# Altium PCB HVPCB.PcbDoc
Units mm, origin at the board's own origin, x right, y up, seen from the top; angles counter-clockwise.
Board outline 175 x 100 mm, 2 copper layers (Top Layer, Bottom Layer); 83 components, 46 nets, 215 pads, 76 vias.
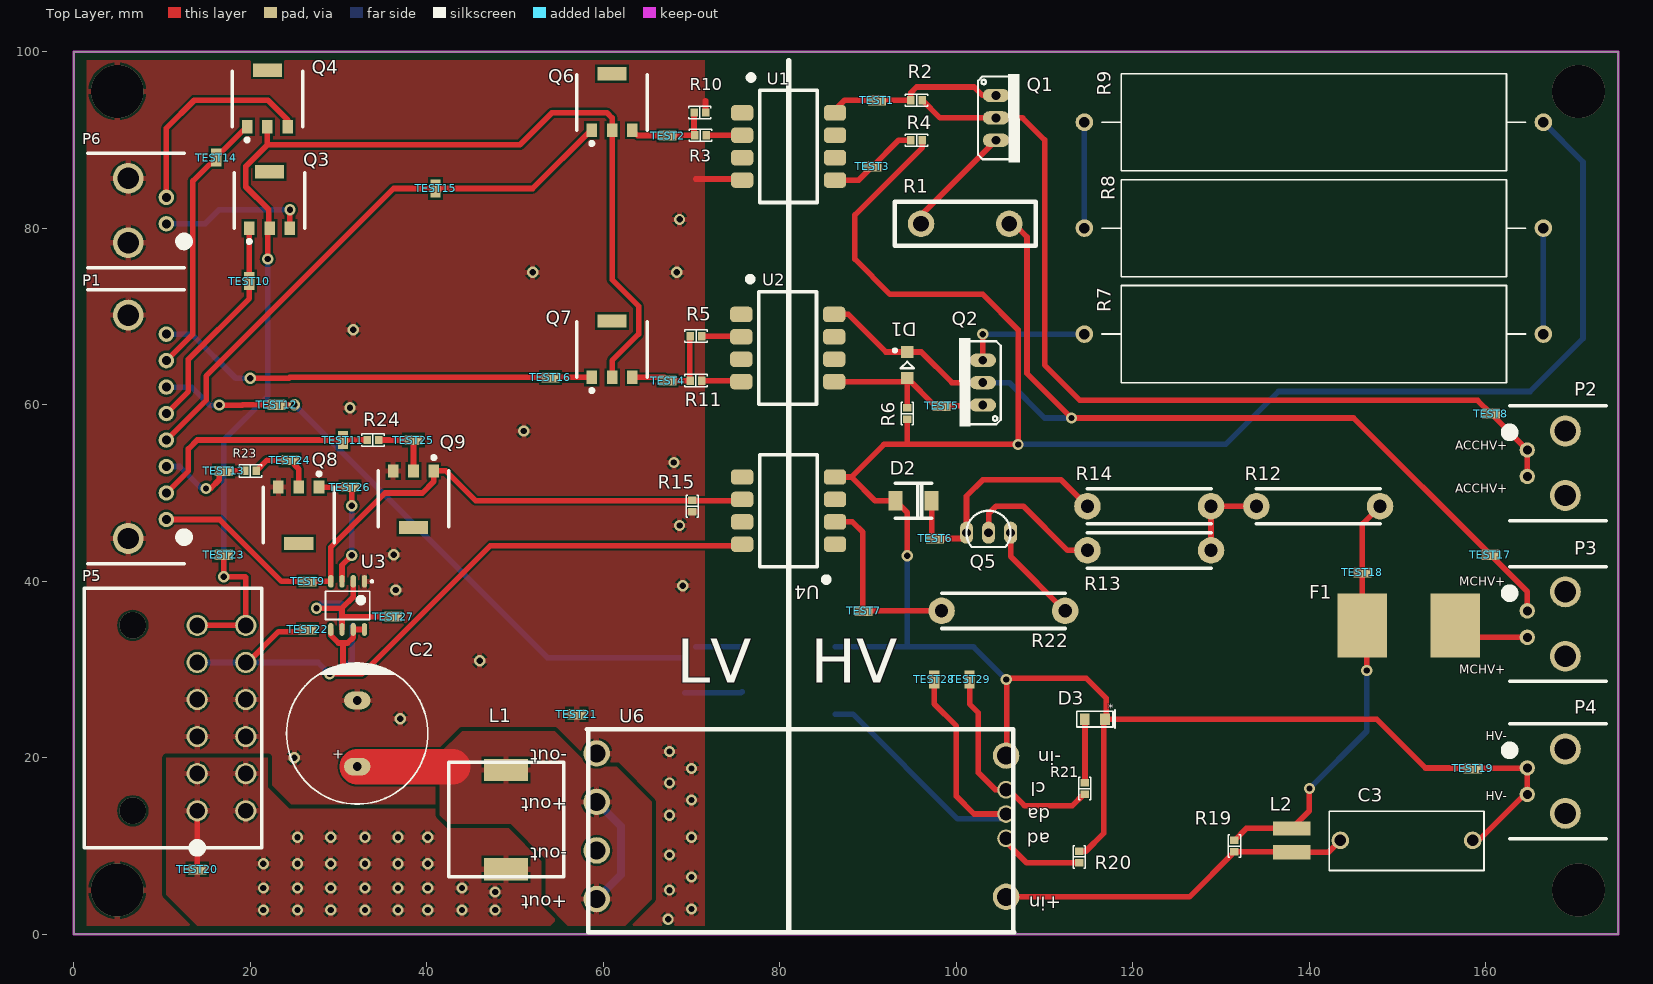
[diagram p0: Top Layer view]
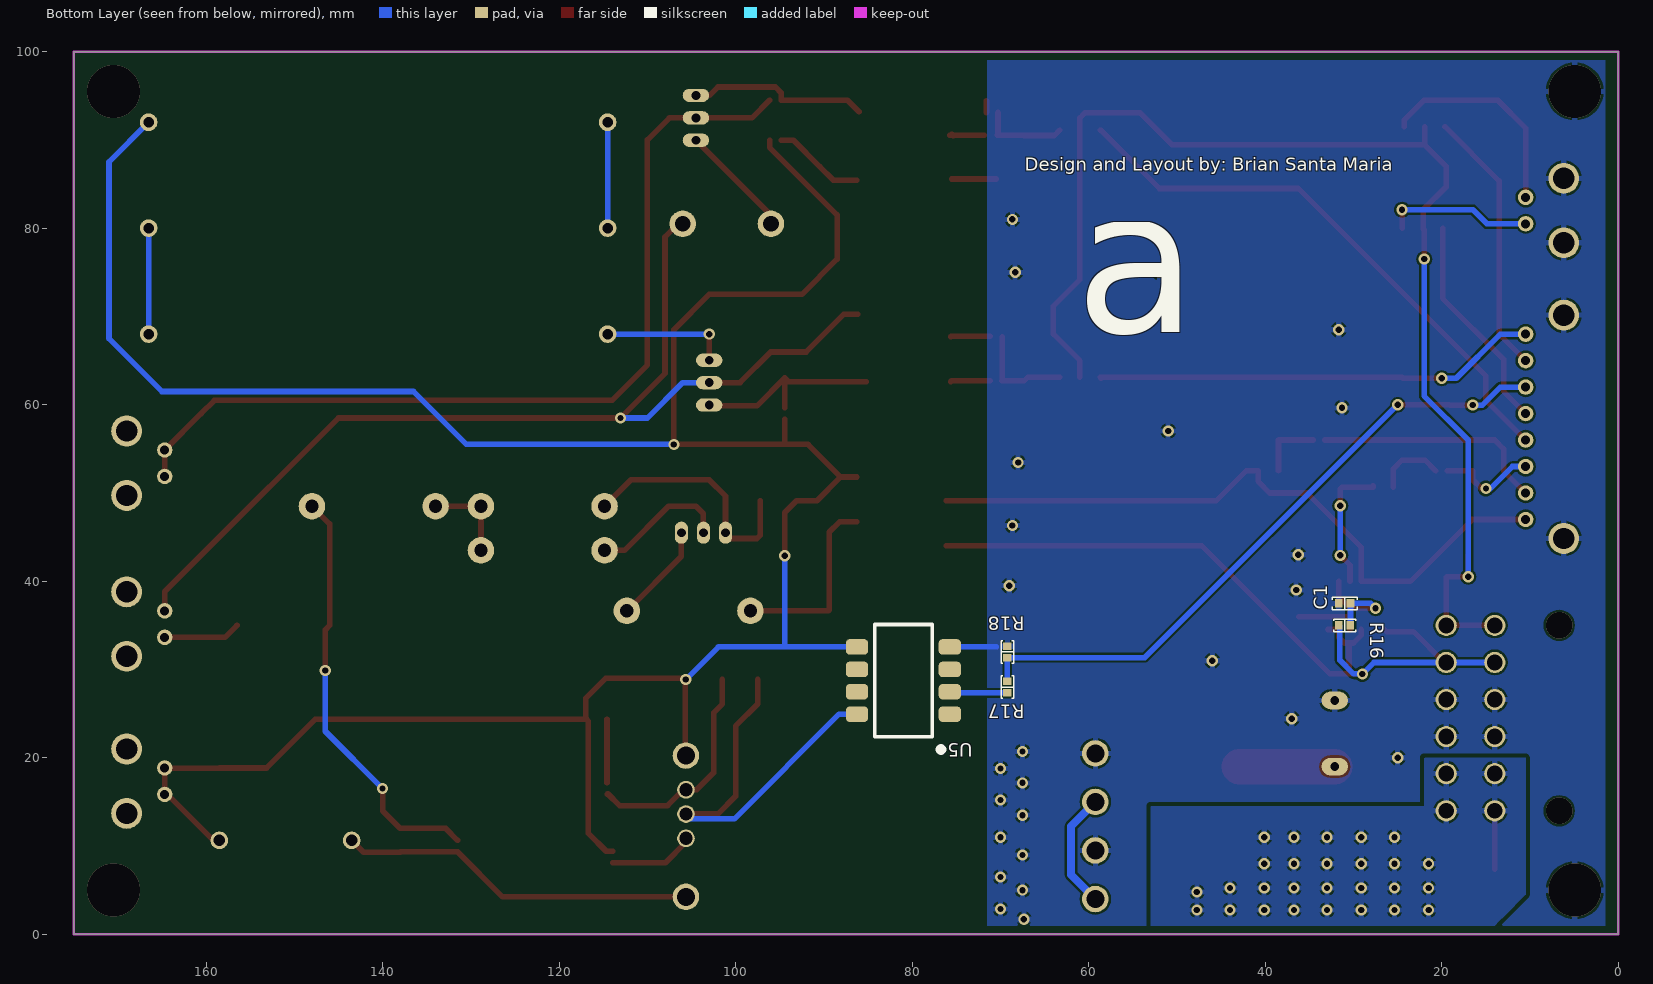
[diagram p1: Bottom Layer view, seen from below]
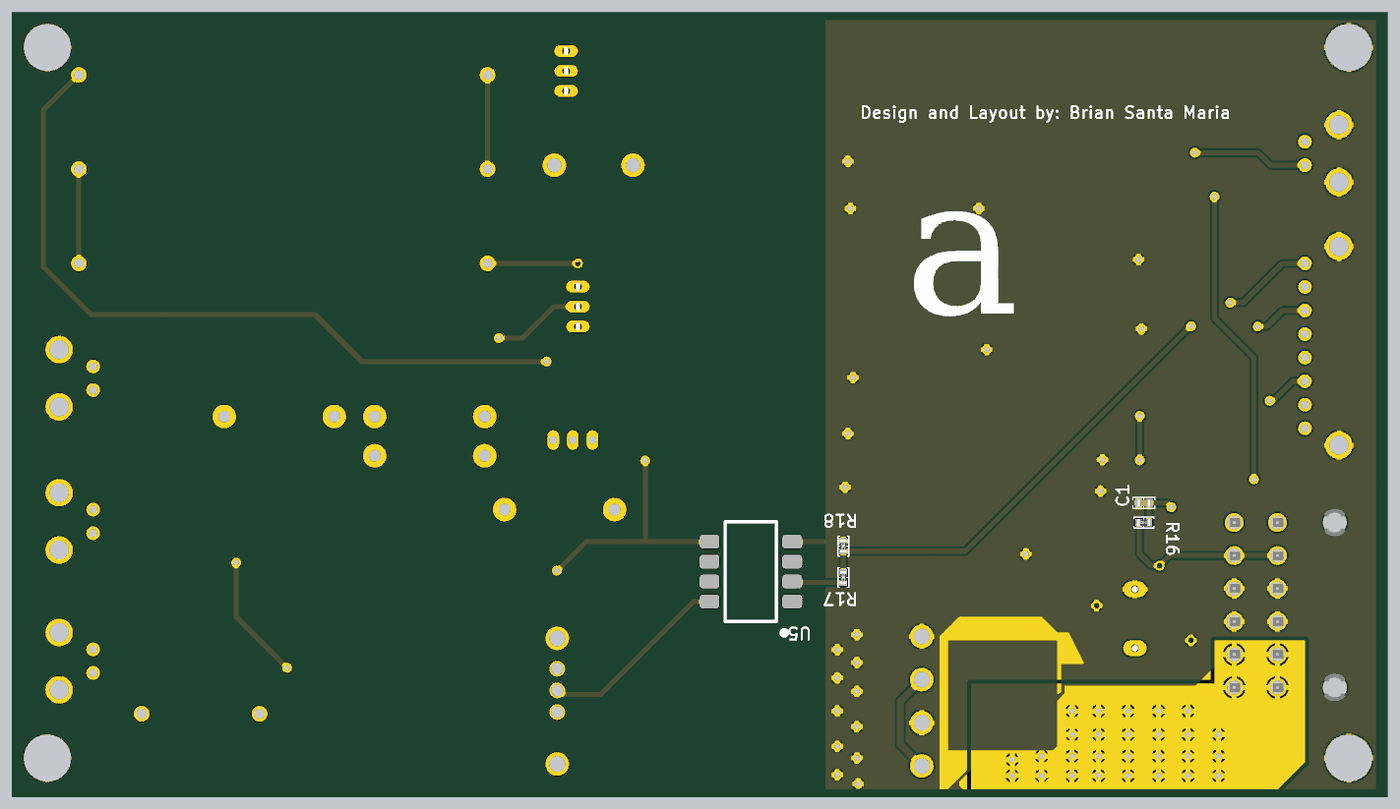
[diagram p2: 3D render of the assembled board from below, using the file's embedded part models]

## Layer stack, top to bottom
Top Solder: solder mask 0.0102, Solder Resist, Dk 3.5
Top Layer: signal copper 0.0356
Dielectric 1: dielectric 0.32, FR-4, Dk 4.8
Bottom Layer: signal copper 0.0356
Bottom Solder: solder mask 0.0102, Solder Resist, Dk 3.5

## Board outline
0,0 175,0 175,100 0,100

## Design rules (kind name [scope] priority, off if disabled: settings)
BoardOutlineClearance [All] p1: gap=0.279 ignorepadtopadclearanceinfootprint=FALSE
Clearance [All] p1: gap=0.254 ignorepadtopadclearanceinfootprint=FALSE except(0.5: Poly-Poly)
HoleSize [All] p1: absolutevalues=TRUE maxlimit=5 minlimit=0.025 maxpercent=80.000 minpercent=20.000
PolygonConnect [All] p1: connectstyle=Relief reliefconductorwidth=0.635 reliefentries=4 polygonreliefangle="90 Angle" airgapwidth=0.254
RoutingVias [All] p1: holewidth=0.711 width=1.27 viastyle="Through Hole" minholewidth=0.711 minwidth=1.27 maxholewidth=0.711 maxwidth=1.27
SolderMaskExpansion [All] p1: expansion=0.102
Width [All] p1: maxlimit=10 minlimit=0.254 preferedwidth=0.635 minimp=50.000000 maximp=50.000000 favimp=50.000000
29 further rules are at their usual default settings.

## Classes and differential pairs
component class Power: C2 C3 D3 L1 L2 R17 R18 R19 R20 R21 TEST28 TEST29 U5 U6
component class LV: C1 Q8 Q9 R16 R23 R24 TEST24 TEST25 TEST26 TEST27 U3
component class HVSchematic: F1 P1 P2 P3 P4 P5 P6 Q3 Q4 TEST8 TEST9 TEST10 TEST11 TEST12 TEST13 TEST14 TEST15 TEST16 TEST17 TEST18 TEST19 TEST20 TEST21 TEST22 TEST23
component class Isolation: D1 D2 Q1 Q2 Q5 Q6 Q7 R1 R2 R3 R4 R5 R6 R7 R8 R9 R10 R11 R12 R13 R14 R15 R22 TEST1 TEST2 TEST3 TEST4 TEST5 TEST6 TEST7 U1 U2 U4

## Components (designator, comment, footprint, x,y, rotation, side; value= is the part's Value field where it differs from the comment)
C1 "Capacitor MLCC 1.0uf 16V CAP 0603/1608" "CAP 0603/1608" 31,37.5 r180 bottom value=1.0uf
C2 "4700uf" "CAP AL TH D16 L7.5 H16.5" 32.127,22.75 r90 top
C3 "HV Cap" ECW-FD2W684K-TH-CAP 158.5,10.65 r180 top value=.68uf
D1 "DDZ9701-7" SOD123F 94.44,64.5 r90 top value=14Vz
D2 "SMBJ5370B" SMBJ5370B-TP 93.106,49.116 r90 top value=56V
D3 "LED" 0805_LED 115.704,24.384 r0 top value=Red
F1 "" 0885004.DR 156.5,35 r180 top value=4A
L1 "744309033" 744309033 49,13 r270 top value=330nH
L2 "SRR3818A-1R0Y" SRR3818A-1R0Y 138,12 r270 top value=1uH
P1 "2-1445054-8" 2-1445054-8 10.5,47 r270 top
P2 "2-1445054-2" 2-1445054-2 164.68,51.873 r90 top
P3 "2-1445054-2" 2-1445054-2 164.68,33.65 r90 top
P4 "2-1445054-2" 2-1445054-2 164.68,15.85 r90 top
P5 "0039301120" 0039301120 14,35 r270 top
P6 "2-1445054-2" 2-1445054-2 10.5,83.5 r270 top
Q1 "FQP3P50" TO-220AB 104.5,92.5 r270 top value=P_Channel
Q2 "FQP3P50" TO-220AB 103,62.5 r90 top value=P_Channel
Q3 "STN3NF06L" STN3NF06L 19.9,80 r0 top value=N_Channel
Q4 "STN3NF06L" STN3NF06L 19.65,91.5 r0 top value=N_Channel
Q5 "Comment" "TO-92 (TO-226)" 103.65,45.5 r180 top value=.5A
Q6 "STN3NF06L" STN3NF06L 58.7,91.1 r0 top value=N_Channel
Q7 "STN3NF06L" STN3NF06L 58.7,63.1 r0 top value=N_Channel
Q8 "STN3NF06L" STN3NF06L 27.8,50.669 r180 top value=N_Channel
Q9 "STN3NF06L" STN3NF06L 40.8,52.5 r180 top value=N_Channel
R1 "Resistor 1k2 100W 1% Throughhole" AP101 96,80.5 r0 top value=1.2k
R2 "Resistor 1.0M 0603 1/10W 10%" "RES 0603/1608" 95.5,94.5 r180 top value=1.0M
R3 "Resistor 3.0k 0603 1/10W 1%" "RES 0603/1608" 71,90.53 r0 top value=3.0k
R4 "Resistor 33M 0603 1/10W 10%" "RES 0603/1608" 95.5,89.96 r180 top value=33M
R5 "Resistor 3.0k 0603 1/10W 1%" "RES 0603/1608" 70.525,67.777 r0 top value=3.0k
R6 "Resistor 1.0M 0603 1/10W 1%" "RES 0603/1608" 94.44,59 r90 top value=1.0M
R7 "Resistor 1.6k Axial 10W 5%" "Axial 52mm Pitch" 166.5,68 r180 top value=1.6k
R8 "Resistor 1.6k Axial 10W 5%" "Axial 52mm Pitch" 114.5,80 r0 top value=1.6k
R9 "Resistor 1.6k Axial 10W 5%" "Axial 52mm Pitch" 166.5,92 r180 top value=1.6k
R10 "Resistor 4.7k 0603 1/10W 5%" "RES 0603/1608" 70.934,93.103 r180 top value=4.7k
R11 "Resistor 4.7k 0603 1/10W 5%" "RES 0603/1608" 70.5,62.729 r180 top value=4.7k
R12 "Resistor 2W TH" PR02 148,48.5 r180 top value=0
R13 "Resistor 2W TH" PR02 128.856,43.5 r180 top value=5.1k
R14 "Resistor 2W TH" PR02 114.856,48.5 r0 top value=10k
R15 "Resistor 4.7k 0603 1/10W 5%" "RES 0603/1608" 70.084,48.5 r90 top value=4.7k
R16 "Resistor 200k 0603 1/10W 1%" "RES 0603/1608" 31,35 r0 bottom value=200k
R17 "Resistor 3.0k 0603 1/10W 1%" "RES 0603/1608" 69.223,28 r270 bottom value=3.0k
R18 "Resistor 4.7k 0603 1/10W 1%" "RES 0603/1608" 69.223,32 r270 bottom value=4.7k
R19 "Resistor 1.0 0603 1/10W 1%" "RES 0603/1608" 131.5,10 r270 top value=1.0
R20 "Resistor 13k 0603 1/10W 1%" "RES 0603/1608" 113.919,8.763 r270 top value=13k
R21 "Resistor 330 0603 1/10W 1%" "RES 0603/1608" 114.554,16.51 r270 top value=330
R22 "Resistor 2W TH" PR02 98.33,36.65 r0 top value=15k
R23 "Resistor 1.0 0603 1/10W 1%" "RES 0603/1608" 20.035,52.5 r180 top value=0
R24 "Resistor 1.0 0603 1/10W 1%" "RES 0603/1608" 33.909,56 r180 top value=0
TEST1 "RCU-0C" RCU-0C 91,94.5 r90 top value=CONN
TEST2 "RCU-0C" RCU-0C 67.295,90.5 r90 top value=CONN
TEST3 "RCU-0C" RCU-0C 90.5,87 r90 top value=CONN
TEST4 "RCU-0C" RCU-0C 67.295,62.729 r90 top value=CONN
TEST5 "RCU-0C" RCU-0C 98.33,59.875 r90 top value=CONN
TEST6 "RCU-0C" RCU-0C 97.59,44.85 r270 top value=CONN
TEST7 "RCU-0C" RCU-0C 89.5,36.65 r90 top value=CONN
TEST8 "RCU-0C" RCU-0C 160.553,59 r90 top value=CONN
TEST9 "RCU-0C" RCU-0C 26.5,39.991 r270 top value=CONN
TEST10 "RCU-0C" RCU-0C 19.9,74 r180 top value=CONN
TEST11 "RCU-0C" RCU-0C 30.5,56 r0 top value=CONN
TEST12 "RCU-0C" RCU-0C 23,60 r270 top value=CONN
TEST13 "RCU-0C" RCU-0C 17,52.5 r270 top value=CONN
TEST14 "RCU-0C" RCU-0C 16.15,88 r0 top value=CONN
TEST15 "RCU-0C" RCU-0C 41,84.5 r0 top value=CONN
TEST16 "RCU-0C" RCU-0C 54,63.1 r270 top value=CONN
TEST17 "RCU-0C" RCU-0C 160.5,43 r90 top value=CONN
TEST18 "RCU-0C" RCU-0C 146,41 r90 top value=CONN
TEST19 "RCU-0C" RCU-0C 158.5,18.798 r90 top value=CONN
TEST20 "RCU-0C" RCU-0C 14,7.375 r90 top value=CONN
TEST21 "RCU-0C" RCU-0C 57,24.94 r90 top value=CONN
TEST22 "RCU-0C" RCU-0C 26.5,34.541 r90 top value=CONN
TEST23 "RCU-0C" RCU-0C 17,43 r90 top value=CONN
TEST24 "RCU-0C" RCU-0C 24.5,53.723 r90 top value=CONN
TEST25 "RCU-0C" RCU-0C 38.5,56 r90 top value=CONN
TEST26 "RCU-0C" RCU-0C 31.3,50.669 r90 top value=CONN
TEST27 "RCU-0C" RCU-0C 36.2,36 r90 top value=CONN
TEST28 "RCU-0C" RCU-0C 97.5,28.875 r180 top value=CONN
TEST29 "RCU-0C" RCU-0C 101.5,28.875 r180 top value=CONN
U1 "VO2223B" "Option 7" 81,89.26 r0 top
U2 "VO2223B" "Option 7" 80.899,66.426 r0 top
U3 "LM555 Timer" SOIC-8 31.038,37.266 r270 top
U4 "VO2223B" "Option 7" 81,48 r180 top
U5 "VO2223B" "Option 7" 81,28.75 r0 bottom
U6 "DCM290P138T600A40" DCM290P138T600A40 82.44,12.25 r180 top value=Null

## Footprints (in the part's own frame and the unit in brackets; to place one, negate y for a bottom-side part, rotate by r counter-clockwise, add the part's x,y. Pads: shape width x height; smd on the part's side, far side on the other; paste and mask are expansions set on the pad)
2-1445054-2 [mm] "2p through hole connector"
  round 1.75 hole 1.02: 1(3,0) 2(0,0)
  round 3.5 hole 2.41: 3(-2.15,-4.32) 4(5.15,-4.32)
  silkscreen extent -5,-8.92 8,2.5, body extent -5,-8.92 8,2, height 4.37
2-1445054-8 [mm] "8p through hole connector"
  round 1.75 hole 1.02: 1(0,0) 2(-3,0) 3(-6,0) 4(-9,0) 5(-12,0) 6(-15,0) 7(-18,0) 8(-21,0)
  round 3.5 hole 2.41: 9(-23.15,-4.32) 10(2.15,-4.32)
  silkscreen extent -26,-8.92 5,2.5, body extent -26,-8.92 5,0, height 4.37
0805_LED [mm]
  rect 1.1x1.3 smd: 1(-1.15,0) 2(1.15,0)
  silkscreen extent -2.06,-1.02 2.29,1.02, body extent -1.05,-0.67 1.05,0.68, height 0.9
0885004.DR [mm] "4A 450VDC nonreset SMD fuse"
  rect 5.6x7.23 smd: 1(0,0) 2(10.5,0)
0039301120 [mm] "12-pin Molex Minifit Jr"
  round 2.4 hole 1.8: 1(21,0) 2(16.8,0) 3(12.6,0) 4(8.4,0) 5(4.2,0) 6(0,0) 7(21,5.5) 8(16.8,5.5) 9(12.6,5.5) 10(8.4,5.5) 11(4.2,5.5) 12(0,5.5)
  silkscreen extent -4.2,-12.8 25.7,7.3, body extent -2.7,-13.9 24.1,6.04, height 11.41
744309033 [mm] "330nH ww inductor"
  rect 2.5x5 smd: 1(-5.625,0) 2(5.625,0)
  silkscreen extent -6.5,-6.5 6.5,6.5
AP101 [mm] "100W Through Hole Resistor"
  round 3 hole 1.8: 1(0,0) 2(10,0)
  silkscreen extent -3,-2.5 13,2.5, body extent -3,-2.5 13,2.5, height 24.5
"Axial 52mm Pitch" [mm]
  round 2 hole 1.2: 1(0,0) 2(52,0)
  silkscreen extent 2,-5.5 50,5.5, body extent 4.19,-5.46 47.88,5.46, height 9.1
"CAP 0603/1608" [mm] "Chip Capacitor, 2-Leads, Body 1.60x0.80mm, IPC Medium Density"
  rect 0.9x1 smd: 1(-0.675,0) 2(0.675,0)
  silkscreen extent -1.4,-0.7 1.4,0.7, body extent -0.8,-0.41 0.8,0.41, height 0.82
"CAP AL TH D16 L7.5 H16.5" [mm] "16MM Diameter, 7.5MM Lead Spacing Aluminium Capacitor"
  oval 2x3 hole 1: 1(-3.75,0) 2(3.75,0)
  silkscreen extent -8,-8 8,8, body extent -8,-7.99 8,7.99, height 16.7
DCM290P138T600A40 [mm] "Vicor DC/DC converter"
  round 3 hole 2.03: 1(-23.19,8) 5(-23.19,-8) 6(23.19,8.25) 7(23.19,2.75) 8(23.19,-2.75) 9(23.19,-8.25)
  round 2 hole 1.52: 2(-23.19,1.38) 3(-23.19,-1.38) 4(-23.19,-4.13)
  silkscreen extent -24.15,-11 24.3,12, body extent -24,-11 24,12, height 7.3
ECW-FD2W684K-TH-CAP [mm]
  round 2 hole 1.3: 1(0,0) 2(15,0)
  silkscreen extent -1.27,-3.3 16.26,3.43, body extent -1.35,-3.3 16.35,3.45, height 10
"Option 7" [mm]
  rrect50% 2.52x1.75 smd mask+0.102: 1(-5.26,3.81)
  rrect50% 2.52x1.75 smd: 2(-5.26,1.27) 3(-5.26,-1.27) 4(-5.26,-3.81) 5(5.26,-3.81) 6(5.26,-1.27) 7(5.26,1.27) 8(5.26,3.81)
  silkscreen extent -4.56,-6.35 3.26,8.11
PR02 [mm] "TH 2W resistor family"
  round 3 hole 1.5: 1(0,0) 2(14,0)
  silkscreen extent 0,-2 14,2
RCU-0C [mm]
  rect 1.15x2.05 smd: 1(0,0)
"RES 0603/1608" [mm] "Chip Resistor, 2-Leads, Body 1.60x0.80mm, IPC Medium Density"
  rect 0.85x0.95 smd: 1(-0.65,0) 2(0.65,0)
  silkscreen extent -1.27,-0.7 1.27,0.7, body extent -0.8,-0.4 0.8,0.4, height 0.45
SMBJ5370B-TP [mm] "56V zener diode"
  rect 2.2x1.6 smd: 1(0,0) 2(0,-4.1)
  silkscreen extent -2,-4.1 2,0
SOD123F [mm] "SODFL, 2-Leads, Body 1.80x3.50mm, IPC Low Density"
  rect 1.35x1.45 smd: 1(-1.475,0) 2(1.475,0)
  silkscreen extent -0.38,-0.76 1.75,1.5, body extent -1.75,-0.95 1.75,0.95, height 1.15
SOIC-8 [mm] "SOIC, 8-Leads, Body 4.90x3.90mm, Pitch 1.27mm, IPC Medium Density"
  oval 1.45x0.6 smd: 1(-2.725,1.905) 2(-2.725,0.635) 3(-2.725,-0.635) 4(-2.725,-1.905) 5(2.725,-1.905) 6(2.725,-0.635) 7(2.725,0.635) 8(2.725,1.905)
  silkscreen extent -2.85,-2.5 1.6,2.88, body extent -3,-2.5 3,2.5, height 1.75
SRR3818A-1R0Y [mm] "1uH fixed inductor"
  rect 1.6x4.3 smd: 1(0,0) 2(2.7,0)
STN3NF06L [mm] "N-channel Power MOSFET"
  rect 1.2x1.5 smd: 1(0,0) 2(2.3,0) 3(4.6,0)
  rect 3.3x1.5 smd: 4(2.3,6.4)
  silkscreen extent -1.7,-1.7 6.3,6.3
"TO-92 (TO-226)" [mm] "TO-92, TO-226, ransistor, MPSA56"
  oval 1.5x2.5 hole 1: 1(2.5,0) 2(0,0) 3(-2.5,0)
  silkscreen extent -2.5,-2.5 2.5,1.61, body extent -2.79,-2.48 2.79,0.96, height 7.37
TO-220AB [mm] "TO-220AB, MOSFET, DIODE, BJT"
  oval 1.5x3 hole 1: 1(-2.54,0) 2(0,0) 3(2.54,0)
  silkscreen extent -4.95,-2.03 5.05,2.71, body extent -5.94,-1.75 5.94,2.65, height 19.11

## Part data
C1: library part 229, Dielectric=Ceramic, Manufacturer_id=1, Package="CAP 0603/1608", Voltage_Rating=16V, Created_By="Nick Mah", Created_Date=10/20/2018, Drawer_id=1, idCapacitor=229, Name="Cap_1.0uf_16V_CAP 0603/1608"
C2: library part 1083, Manufacturer_id=1, MfrPartNo=UVZ1E472MHD, Package=TH, Tolerance=20%, Voltage_Rating=25V, ComponentLink1Description=Datasheet, Created_By="Angel Delgado", Drawer_id=1, idCapacitor=1083, Link=https://www.digikey.com/product-detail/en/nichicon/UVZ1E472MHD/493-1308-ND/589049, Name="Cap_4700uf_25V_CAP TH"
C3: library part 1082, Dielectric=Polypropylene, Manufacturer_id=1, MfrPartNo=ECW-FD2W684K, Package=TH, Tolerance=10%, Voltage_Rating=450V, ComponentLink1Description=Datasheet, Created_By="Angel Delgado", Drawer_id=1, idCapacitor=1082, Link=https://www.mouser.com/ProductDetail/Panasonic/ECW-FD2W684K?qs=sGAEpiMZZMsh%252b1woXyUXj8Oz95SkSMnKDNbVTfkAU30%3d, Name="Cap_.68uf_450V_CAP TH"
D1: library part 10, "Zener Diode 14V 500mW ±5% Surface Mount SOD-123", Manufacturer_id=8, Package=SOD-123, Power=500mW, Supplier1PartNo=DDZ9701-7DICT-ND, ComponentLink1Description=Datasheet, ComponentLink1URL=https://www.diodes.com/assets/Datasheets/ds30410.pdf, Drawer_id=1, idDiode=10, Link=https://www.digikey.com/product-detail/en/diodes-incorporated/DDZ9701-7/DDZ9701-7DICT-ND/3877402, MfrPartNo=DDZ9701-7, Name=DDZ9701, Num_Circuits=1, Supplier1=Digi-Key, Type=Zener
D2: library part 13, "56V Zener Diode", Manufacturer_id=1, Supplier1PartNo=SMBJ5370B-TPMSCT-ND, ComponentLink1Description=Digikey, ComponentLink1URL=https://www.digikey.com/product-detail/en/micro-commercial-co/SMBJ5370B-TP/SMBJ5370B-TPMSCT-ND/3165257, Created_By=Graydon, Drawer_id=1, idDiode=13, Link=https://www.digikey.com/product-detail/en/micro-commercial-co/SMBJ5370B-TP/SMBJ5370B-TPMSCT-ND/3165257, Name=SMBJ5370B-TP, Num_Circuits=1, Supplier1=Digikey, Type=Zener
D3: library part 1, Package=0805, Drawer_id=1, idLED=1, Manufacturer_id=1, Name=LED_0805_RED, Vf=0.7V
F1: library part 7, Manufacturer_id=1, MfrPartNo=0885004.DR, Created_By=Graydon, Created_Date=11/12/2018, Drawer_id=1, I_hold=4A, idFuse=7, Link=https://www.digikey.com/product-detail/en/littelfuse-inc/0885004.DR/F10991CT-ND/8345705, Name=0885004.DR, Pd_Typ=316mW, V_max=450VDC
L1: library part 3, "330nH wirewound inductor", Manufacturer_id=1, Package=Nonstandard, Supplier1PartNo=732-3006-1-ND, Created_By=Graydon, Created_Date=11/12/2018, Drawer_id=1, idInductor=3, Link=https://www.digikey.com/product-detail/en/wurth-electronics-inc/744309033/732-3006-1-ND/2626130, MfrPartNo=744309033, Name=744309033, Supplier1=Digikey
L2: library part 4, "1uH fixed inductor", Manufacturer_id=1, Package=Nonstandard, Supplier1PartNo=652-SRR3818A-1R0Y, ComponentLink1Description=Mouser, ComponentLink1URL=https://www.mouser.com/ProductDetail/Bourns/SRR3818A-1R0Y?qs=EU6FO9ffTwdCQ1wGwZI3iw%3D%3D, Created_By=Graydon, Created_Date=11/12/2018, Drawer_id=1, idInductor=4, Link=https://www.mouser.com/ProductDetail/Bourns/SRR3818A-1R0Y?qs=EU6FO9ffTwdCQ1wGwZI3iw%3D%3D, MfrPartNo=SRR3818A-1R0Y, Name=SRR3818A-1R0Y, Supplier1=Mouser
P1: library part 12, "1x8 connector", Manufacturer_id=5, Supplier1PartNo=2-1445054-8-ND, ComponentLink1Description=Datasheet, Created_By=Graydon, Created_Date=11/10/2018, Drawer_id=1, idConn=12, Link=https://www.digikey.com/product-detail/en/te-connectivity-amp-connectors/2-1445054-8/2-1445054-8-ND/1890093, MfrPartNo=2-1445054-8, Name="Micro MATE-N-LOK 1x8", Num_Contacts=8, Num_Rows=1, Supplier1=Digi-Key
P2 P3 P4 P6: library part 16, "1x2 connector", Manufacturer_id=5, Supplier1PartNo=2-1445054-2-ND, Voltage_Rating=Null, ComponentLink1Description=Digikey, ComponentLink1URL=Null, Created_By=Graydon, Created_Date=11/12/2018, Drawer_id=1, idConn=16, Link=https://www.digikey.com/products/en?keywords=2-1445054-2, MfrPartNo=2-1445054-2, Name="Micro MATE-N-LOK 1x2", Num_Contacts=2, Num_Rows=1, Pitch=Null, Supplier1=Digi-Key, Updated_By=Null
P5: library part 20, "Molex Minifit Jr 12p right angle", idConn=20
Q1 Q2: library part 5, Manufacturer_id=1, Package=TO-220, Power(Max)=85W, Supplier1PartNo=FQP3P50-ND, Created_By=Angel, Drawer_id=1, Id=2.7A, idFETs=5, Link=https://www.digikey.com/product-detail/en/on-semiconductor/FQP3P50/FQP3P50-ND/1055021, MfrPartNo=FQP3P50, Name=FQP3P50, Num_Circuits=1, Rds_On=4Ohms, Supplier1=Digi-Key, Vdss=500V, Vgs(Max)=5.0V, Vgs(typ)=4.0v
Q3 Q4 Q6 Q7 Q8 Q9: library part 8, "MOSFET N-CH 60V 4A SOT223", Manufacturer_id=1, Package=SOT-233, Power(Max)=3.3W, Supplier1PartNo=497-3177-1-ND, ComponentLink1Description=Datasheet, ComponentLink1URL=https://www.st.com/content/ccc/resource/technical/document/datasheet/b1/52/93/f0/a9/a9/40/d7/CD00002430.pdf/files/CD00002430.pdf/jcr:content/translations/en.CD00002430.pdf, Created_By=Graydon, Created_Date=11/26/2018, Drawer_id=1, Id=4A, idFETs=8, Link=https://www.digikey.com/product-detail/en/stmicroelectronics/STN3NF06L/497-3177-1-ND/654516, MfrPartNo=STN3NF06L, Name=STN3NF06L, Num_Circuits=1, Rds_On=70m, Supplier1=Digkey, Vdss=60V, Vgs(Max)="+/- 16V"
Q5: library part 1, Created_By="Angel Delgado", Created_Date=6/10/2018, Drawer_id=1, hFE=100, idBJT=1, Manufacturer_id=1, Name=MPSA56, Type=PNP
R1: library part 2705, "100W Throughhole Resistor", Manufacturer_id=1, MfrPartNo="AP101 1K2 J", Package=TO-247-2, Power=100W, Supplier Part Number 1=AP1011K2J-ND, Tolerance=5%, ComponentLink1Description=Datasheet, ComponentLink1URL=https://www.ohmite.com/assets/docs/acl_ap101.pdf?r=false, Created_By=Graydon, Created_Date=2018-11-24, Drawer_id=1, idResistor=2705, Link=https://www.digikey.com/short/jvdcjz, Name="AP101 1K2 J", Supplier 1=Digi-Key
R2: library part 2341, Manufacturer_id=1, Package=0603, Power=1/10W, Tolerance=10%, ComponentLink1Description=Datasheet, Created_By="Nick Mah", Created_Date=2018-10-20, Drawer_id=1, idResistor=2341, Name=Res_1.0M_0603_1/10W_10%, Supplier 1=Digi-Key
R3 R5 R17: library part 300, Manufacturer_id=1, Package=0603, Power=1/10W, Tolerance=1%, ComponentLink1Description=Datasheet, Created_By="Nick Mah", Created_Date=2018-10-20, Drawer_id=1, idResistor=300, Name=Res_3.0k_0603_1/10W_1%, Supplier 1=Digi-Key
R4: library part 2359, Manufacturer_id=1, Package=0603, Power=1/10W, Tolerance=10%, ComponentLink1Description=Datasheet, Created_By="Nick Mah", Created_Date=2018-10-20, Drawer_id=1, idResistor=2359, Name=Res_33M_0603_1/10W_10%, Supplier 1=Digi-Key
R6: library part 361, Manufacturer_id=1, Package=0603, Power=1/10W, Tolerance=1%, ComponentLink1Description=Datasheet, Created_By="Nick Mah", Created_Date=2018-10-20, Drawer_id=1, idResistor=361, Name=Res_1.0M_0603_1/10W_1%, Supplier 1=Digi-Key
R7 R8 R9: library part 2706, Manufacturer_id=1, MfrPartNo=SQP10AJB-1K6, Package=Axial, Power=10W, Supplier Part Number 1=Digi-Key, Tolerance=5%, ComponentLink1Description=Datasheet, Drawer_id=1, idResistor=2706, Link=https://www.digikey.com/product-detail/en/yageo/SQP10AJB-1K6/1.6KW-10-ND/18787, Name=Res_1.6k_Axial_10W_5%, Supplier 1=Digi-Key
R10 R11 R15: library part 1385, Manufacturer_id=1, Package=0603, Power=1/10W, Tolerance=5%, ComponentLink1Description=Datasheet, Created_By="Nick Mah", Created_Date=2018-10-20, Drawer_id=1, idResistor=1385, Name=Res_4.7k_0603_1/10W_5%, Supplier 1=Digi-Key
R12 R13 R14 R22: library part 2707, "2W TH resistor", Manufacturer_id=1, Package=Axial, Power=2W, Supplier Part Number 1=Digi-Key, Tolerance=5%, ComponentLink1Description=Datasheet, Created_By=Graydon, Created_Date=2018-12-01, Drawer_id=1, idResistor=2707, Link=https://www.digikey.com/products/en/resistors/through-hole-resistors/53?FV=ffec4976, Name=PR02
R16: library part 344, Manufacturer_id=1, Package=0603, Power=1/10W, Tolerance=1%, ComponentLink1Description=Datasheet, Created_By="Nick Mah", Created_Date=2018-10-20, Drawer_id=1, idResistor=344, Name=Res_200k_0603_1/10W_1%, Supplier 1=Digi-Key
R18: library part 305, Manufacturer_id=1, Package=0603, Power=1/10W, Tolerance=1%, ComponentLink1Description=Datasheet, Created_By="Nick Mah", Created_Date=2018-10-20, Drawer_id=1, idResistor=305, Name=Res_4.7k_0603_1/10W_1%, Supplier 1=Digi-Key
R19 R23 R24: library part 217, Manufacturer_id=1, Package=0603, Power=1/10W, Tolerance=1%, ComponentLink1Description=Datasheet, Created_By="Nick Mah", Created_Date=2018-10-20, Drawer_id=1, idResistor=217, Name=Res_1.0_0603_1/10W_1%, Supplier 1=Digi-Key
R20: library part 316, Manufacturer_id=1, Package=0603, Power=1/10W, Tolerance=1%, ComponentLink1Description=Datasheet, Created_By="Nick Mah", Created_Date=2018-10-20, Drawer_id=1, idResistor=316, Name=Res_13k_0603_1/10W_1%, Supplier 1=Digi-Key
R21: library part 277, Manufacturer_id=1, Package=0603, Power=1/10W, Tolerance=1%, ComponentLink1Description=Datasheet, Created_By="Nick Mah", Created_Date=2018-10-20, Drawer_id=1, idResistor=277, Name=Res_330_0603_1/10W_1%, Supplier 1=Digi-Key
TEST1 TEST2 TEST3 TEST4 TEST5 TEST6 TEST7 TEST8 TEST9 TEST10 TEST11 TEST12 TEST13 TEST14 TEST15 TEST16 TEST17 TEST18 TEST19 TEST20 TEST21 TEST22 TEST23 TEST24 TEST25 TEST26 TEST27 TEST28 TEST29: library part 14, "Test point", Manufacturer_id=1, Supplier1PartNo=None, ComponentLink1Description=Null, ComponentLink1URL=Null, Created_By=Graydon, Created_Date=11/10/2018, Drawer_id=1, idConn=14, Link=https://www.digikey.com/product-detail/en/te-connectivity-amp-connectors/RCU-0C/A106145CT-ND/3477802, MfrPartNo=RCU-0C, Name=RCU-0C, Num_Contacts=1, Num_Rows=1, Package=RCU-0C, Supplier1=None, Updated_By=Null
U1 U2 U4 U5: library part 19, "Optocoupler, Power Phototriac", Manufacturer_id=1, Drawer_id=1, idIC_Misc=19, Name="VO2223B Optocoupler"
U3: library part 17, Manufacturer_id=1, Drawer_id=1, idIC_Misc=17, Name="LM555 Timer"
U6: library part 24, "Vicor DC/DC converter", Manufacturer_id=1, Supplier1PartNo=1102-5388-ND, Created_By=Graydon, Data_Rate=Null, Drawer_id=1, idIC_Misc=24, Link=http://www.vicorpower.com/documents/datasheets/ds_DCM290y138x600A40.pdf, MfrPartNo=DCM290P138T600A40, Name=DCM290P138T600A40, Num_Circuits=1, Protocol=Null, Supplier1=Digikey, Type=Null, Vin(Max)=Null, Vin(Min)=Null

## Via types
v1: diameter 1.27, hole 0.711, Top Layer to Bottom Layer, 70 vias
v2: diameter 6, hole 6, Top Layer to Bottom Layer, 4 vias
v3: diameter 3, hole 3, Top Layer to Bottom Layer, 2 vias

## Nets (pads, with @x,y where several pads share a name; then routed paths per layer and width w, separated by ;. In a path a pad name is that pad's centre, name@x,y a point inside that pad or via, vN(x,y) a via of type N, cw(c..) or ccw(c..) an arc to the next point about the centre after c; other vN are vias at no path point)
+12V: P5.5 P5.11 R16.2 TEST22.1 U3.5 U3.7 U3.8 U4.8 | length 93.9
  Top Layer w0.635: P5.11 19.719,30.8 23.219,34.3 26.259,34.3 TEST22.1 ; v1(29,29.5) 30.5,29.5 ; U3.5 29.133,33.867 30,33 30.512,33 ; U3.8 U3.7 31.673,33.65 31.023,33 30.512,33 ; U4.8@76.139,44.036 47.205,44.036 32.669,29.5 30.5,29.5 ; 30.5,29.5 30.512,29.512 30.512,33
  Bottom Layer w0.635: P5.5 P5.11 27.7,30.8 v1(29,29.5) 30,29.5 31.561,31.061 31.561,34.911 R16.2
+12V_Out: L1.2 P5.1 P5.2 P5.7 P5.8 TEST20.1 | length 6.6
  Top Layer w0.635: TEST20.1 P5.1
  other v1: 21.495,2.754 25.368,2.754 29.127,2.754 33,2.754 36.75,2.754 40.127,2.754 44,2.754 47.75,2.754 47.75,4.798 21.495,5.246 25.368,5.246 29.127,5.246 33,5.246 36.75,5.246 40.127,5.246 44,5.246 21.495,8 25.368,8 29.118,8 33.002,8 36.75,8 40.118,8 25.368,11 29.118,11 33.002,11 36.75,11 40.118,11
ACCHV+: P2.1 P2.2 Q1.2 R2.1 TEST8.1 | length 102.9
  Top Layer w0.635: R2.1 98.15,92.5 Q1.2 107.5,92.5 110,90 110,64.5 114,60.5 159.053,60.5 TEST8.1 P2.1 P2.2
AIR+: P1.5 Q3.1 TEST10.1 | length 24.9
  Top Layer w0.635: P1.5 13,61.5 13,63.5 13,65.15 19.9,72.05 Q3.1
AIR-: P1.7 Q4.1 TEST14.1 | length 30.3
  Top Layer w0.635: P1.7 13.5,68 13.5,69 13.5,85.35 Q4.1
DCDCEnIso: TEST28.1 U5.8 U6.3 | length 45
  Top Layer w0.635: TEST28.1 97.5,26.09 100,23.59 100,15.65 102.02,13.63 U6.3
  Bottom Layer w0.635: U5.8 88.289,24.94 100.148,13.081 U6.3@105.664,13.081
GND: C1.1 C2.2 P1.9 P1.10 P5.3 P5.4 P5.9 P5.10 P6.3 P6.4 Q8.3 Q9.3 R10.1 R11.1 R15.1 R18.1 TEST21.1 U1.4 U2.4 U3.1 U5.4 U6.7 U6.9 | length 16.1
  Top Layer w0.635: 70.5,85.572 U1.4@75.512,85.572 ; R11.1 75.526,62.729 U2.4 ; R10.1 71.584,94.416
  Bottom Layer w0.635: 70.5,32.56 U5.4
  other v1: 67.35,1.709 70,2.87 67.5,5.009 70,6.5 67.5,9 70,11 67.5,13.5 70,15.218 67.5,17.16 70,18.798 25,20 67.5,20.718 37,24.42 46,31 36.5,39.001 69,39.5 36.259,43 68.65,46.33 68,53.453 51,57.023 31.3,59.65 31.673,68.5 52,75 68.333,75 68.65,81
  other v2: 4.938,5 4.938,95.5
HV-: C3.1 D2.1 D3.2 P4.1 P4.2 R4.1 R6.1 R9.1 R20.1 TEST19.1 U4.4 U5.5 U6.5 | length 316.8
  Top Layer w0.635: U4.4 88.111,51.81 ; v1(94.44,42.893) 94.44,47.782 D2.1 90.805,49.116 88.111,51.81 ; R6.1 94.44,55.56 94.5,55.5 ; R4.1 96.15,89.15 88.5,81.5 88.5,76.5 92.5,72.5 103,72.5 107,68.5 v1(107,55.5) 94.5,55.5 ; v1@105.664,29 114.727,29 117,26.728 117,24.53 D3.2 147.616,24.384 153.15,18.85 158.448,18.85 TEST19.1 164.628,18.798 P4.1 P4.2 164.35,15.85 159.15,10.65 C3.1 ; U6.5@105.727,19.875 105.727,28.228 ; R20.1 114.666,9.413 116.683,11.43 ; 116.698,11.43 D3.2@116.698,24.13 ; 88.111,51.81 91.801,55.5 94.5,55.5
  Bottom Layer w0.635: U5.5 94.5,32.56 ; v1(94.44,42.893) 94.44,32.62 94.5,32.56 ; v1@105.414,29.086 101.94,32.56 94.5,32.56 ; v1(107,55.5) 130.5,55.5 136.5,61.5 165,61.5 171,67.5 171,87.5 R9.1 ; P4.2@164.68,15.617 P4.2
  other v1: 105.664,28.875
MCHV+: D1.2 P3.1 Q2.2 R1.2 TEST17.1 U2.8 | length 118.9
  Top Layer w0.635: U2.8 87.764,70.236 92.025,65.975 D1.2 96.025,65.975 99.5,62.5 Q2.2 ; R1.2 106.5,80.5 108,79 108,63.544 v1(113.044,58.5) 145,58.5 TEST17.1 164.68,38.82 P3.1
  Bottom Layer w0.635: Q2.2 106,62.5 110,58.5 v1(113.044,58.5)
MCHV+_Fsd: F1.2 L2.1 R12.1 R19.1 TEST18.1 | length 48
  Top Layer w0.635: R19.1 132.85,12 L2.1 140,14 v1@140,16.38 ; v1(146.5,29.893) 146.5,34.5 F1.2 TEST18.1 146,46.5 R12.1
  Bottom Layer w0.635: v1(140,16.51) 146.5,23.01 v1(146.5,29.893)
NetC1_2: C1.2 R16.1 TEST27.1 U3.2 U3.6 | length 20.2
  Top Layer w0.635: v1(27.5,36.954) 30.403,36.954 ; U3.6 30.403,36 ; U3.2 31.673,38.224 30.403,36.954 ; TEST27.1 30.403,36 ; 30.403,36 30.403,36.954
  Bottom Layer w0.635: v1(27.5,36.954) 28.046,37.5 C1.2 30.35,37.475 R16.1
NetC2_1: C2.1 L1.1 U6.6 U6.8 | length 24.1
  Top Layer w4: C2.1 42.935,19
  Bottom Layer w0.889: U6.6 62,6.75 62,12.25 U6.8
NetC3_2: C3.2 L2.2 R19.2 U6.1 | length 40.6
  Top Layer w0.635: U6.1 126.4,4.25 R19.2 137.95,9.35 L2.2 142.15,9.3 C3.2
NetD1_1: D1.1 Q2.1 R6.2 TEST5.1 U2.5 | length 22.7
  Top Layer w0.635: U2.5@85.203,62.616 U2.5 94.031,62.616 D1.1 ; R6.2 D1.1 ; Q2.1 102.915,59.875 TEST5.1 97.59,59.875 D1.1
NetD2_2: D2.2 Q5.1 R14.1 TEST6.1 | length 28.1
  Top Layer w0.635: D2.2 97.206,45.234 TEST6.1 100.5,44.85 Q5.1 101.15,49.65 103,51.5 111.856,51.5 R14.1
NetD3_1: D3.1 R21.1 | length 7.2
  Top Layer w0.635: R21.1@114.574,17.16 D3.1@114.574,24.384
NetF1_1: F1.1 P3.2 | length 8.7
  Top Layer w0.635: F1.1 157.85,33.65 P3.2
NetP1_1: P1.1 Q9.1 R15.2 TEST9.1 U3.4 U4.6 | length 78.1
  Top Layer w0.635: P1.1 14,47 16.535,47 23.544,39.991 U3.4 29.133,43.863 35.27,50 39.5,50 40.8,51.3 Q9.1 42.169,52.5 45.539,49.131 76.124,49.131 U4.6@76.139,49.116
NetP1_2: P1.2 R24.2 TEST11.1 | length 26.7
  Top Layer w0.635: P1.2 13,52.5 13,54 13,55 14,56 R24.2
NetP1_3: P1.3 R23.2 TEST13.1 | length 11.3
  Top Layer w0.635: v1(15,50.5) 15.5,50.5 16.5,51.5 16.5,52.5 R23.2
  Bottom Layer w0.635: P1.3 12,53 14.5,50.5 v1(15,50.5)
NetP1_4: P1.4 Q6.1 TEST15.1 | length 64.4
  Top Layer w0.635: P1.4 13.5,59 15,60.5 15,63.253 36.247,84.5 52,84.5 58.6,91.1 Q6.1
NetP1_6: P1.6 R17.1 R18.2 TEST12.1 | length 74.2
  Top Layer w0.635: v1(16.5,59.96) 19.085,59.96 19.125,60 v1(25,60)
  Bottom Layer w0.635: P1.6 13.359,62 15.399,59.96 v1(16.5,59.96) ; v1(25,60) 53.65,31.35 R18.2 R17.1
NetP1_8: P1.8 Q7.1 TEST16.1 | length 50.5
  Top Layer w0.635: v1(20,63) 24.4,63 24.5,63.1 Q7.1 Q7.1@58.6,63
  Bottom Layer w0.635: P1.8 13.359,68 18.359,63 v1(20,63)
NetP5_6: P5.6 P5.12 Q3.2 Q4.2 Q6.2 Q7.2 TEST23.1 | length 143.8
  Top Layer w0.635: P5.6 P5.12 19.5,40.44 19.44,40.5 v1(17,40.5) TEST23.1 ; Q4.2 21.95,89.45 ; v1(22,76.5) 22,79.8 22.1,79.9 22.1,82.1 19.5,84.7 19.5,87 21.95,89.45 ; Q7.2 61,65 64,68 64,71.171 61,74.171 Q6.2 61,92.5 60.427,93.073 54.178,93.073 50.555,89.45 21.95,89.45
  Bottom Layer w0.635: v1(17,40.5) 17,56 22,61 v1(22,76.5)
NetP6_1: P6.1 Q3.3 | length 16.8
  Top Layer w0.635: Q3.3 v1(24.5,82.1)
  Bottom Layer w0.635: P6.1 14.9,80.5 16.5,82.1 v1(24.5,82.1)
NetP6_2: P6.2 Q4.3 | length 24.6
  Top Layer w0.635: P6.2 10.5,91.339 13.661,94.5 22,94.5 24.25,92.25 Q4.3
NetQ1_1: Q1.1 R2.2 TEST1.1 U1.8 | length 20.5
  Top Layer w0.635: U1.8@86.032,93.192 87.34,94.5 TEST1.1 R2.2 94.85,95.35 95.5,96 102,96 102.96,95.04 Q1.1
NetQ1_3: Q1.3 R1.1 | length 13.4
  Top Layer w0.635: R1.1@95.04,80.5 Q1.3
NetQ2_3: Q2.3 R7.2 | length 13.5
  Top Layer w0.635: Q2.3 v1(103,68)
  Bottom Layer w0.635: v1(103,68) 113.5,68
NetQ5_2: Q5.2 R13.2 | length 15.8
  Top Layer w0.635: Q5.2 103.65,47.65 104.5,48.5 107.6,48.5 112.6,43.5 R13.2
NetQ5_3: Q5.3 R22.2 | length 11.9
  Top Layer w0.635: Q5.3@106.15,46 Q5.3 106.15,42.83 R22.2
NetQ6_3: Q6.3 R3.1 R10.2 TEST2.1 | length 9.9
  Top Layer w0.635: Q6.3 63.9,90.5 TEST2.1 67.325,90.53 R3.1 70.284,90.596 R10.2
NetQ7_3: Q7.3 R5.1 R11.2 TEST4.1 | length 11.7
  Top Layer w0.635: Q7.3 66.924,63.1 TEST4.1 R11.2 69.795,62.784 R5.1@69.795,67.696
NetQ8_1: Q8.1 TEST26.1 U3.3 | length 14.8
  Top Layer w0.635: Q8.1@27.8,50.8 Q8.1 TEST26.1 31.503,50.467 v1(31.503,48.565) ; U3.3 30.403,41.835 v1(31.503,42.935)
  Bottom Layer w0.635: v1(31.503,42.935) v1(31.503,48.565)
NetQ8_2: Q8.2 R23.1 TEST24.1 | length 7.8
  Top Layer w0.635: R23.1 21.908,53.723 TEST24.1 25.5,52.723 Q8.2
NetQ9_2: Q9.2 R24.1 TEST25.1 | length 7.4
  Top Layer w0.635: R24.1 TEST25.1 Q9.2
NetR3_2: R3.2 U1.2 | length 4.1
  Top Layer w0.635: R3.2@71.83,90.53 U1.2@75.39,90.53 ; U1.2@75.36,90.5 U1.2@75.39,90.53 ; U1.2@75.512,90.652 U1.2@75.39,90.53 ; U1.2 U1.2@75.39,90.53
NetR4_2: R4.2 TEST3.1 U1.5 | length 10.5
  Top Layer w0.635: U1.5 88.95,85.45 TEST3.1 93.46,89.96 R4.2
NetR5_2: R5.2 U2.2 | length 4.5
  Top Layer w0.635: R5.2 75.558,67.777 U2.2
NetR7_1: R7.1 R8.2 | length 12
  Bottom Layer w0.635: R7.1 R8.2
NetR8_1: R8.1 R9.2 | length 12
  Bottom Layer w0.635: R8.1 R9.2
NetR12_2: R12.2 R13.1 R14.2 | length 10.1
  Top Layer w0.635: R13.1 R14.2 R12.2
NetR17_2: R17.2 U5.2 | length 6.6
  Bottom Layer w0.635: R17.2 75.61,27.35 U5.2
NetR20_2: R20.2 U6.2 | length 9.2
  Top Layer w0.635: U6.2@105.664,10.414 107.965,8.113 R20.2
NetR21_2: R21.2 TEST29.1 U6.4 | length 24.3
  Top Layer w0.635: TEST29.1 101.5,26.09 102.5,25.09 102.5,18.31 104.43,16.38 U6.4 ; U6.4@106.301,16.004 107.717,14.588 113.155,14.588 114.49,15.924 R21.2
NetR22_1: R22.1 TEST7.1 U4.2 | length 21.4
  Top Layer w0.635: U4.2 88.23,46.73 89.4,45.56 89.4,36.75 TEST7.1 R22.1
pads on no net: P2.3 P2.4 P3.3 P3.4 P4.3 P4.4 Q3.4 Q4.4 Q6.4 Q7.4 Q8.4 Q9.4 U1.1 U1.3 U1.6 U1.7 U2.1 U2.3 U2.6 U2.7 U4.1 U4.3 U4.5 U4.7 U5.1 U5.3 U5.6 U5.7
copper on no net:
  other v2: 170.5,5 170.5,95.5
  other v3: 6.7,14 6.7,35

## Polygon pours and split planes (outlines as drawn)
GND on Top Layer "Top Layer-GND" (solid, pour order 26): 1.5,1 71.5,1 71.5,99 1.5,99
+12V_Out on Top Layer "Top Layer-+12V_Out" (solid, pour order 24): 24.439,14.226 22,16.665 22,20 10.5,20 10.5,14.5 10.5,4.5 14,1 54,1 54.5,1.5 54.5,12.782 43.218,12.782 41.773,14.226
NetC2_1 on Top Layer "Top Layer-NetC2_1" (solid, pour order 15): 62.5,1 65.5,4 65.5,15 61.5,19 58.5,19 54.5,23 44,23 41.5,20.5 41.5,13.5 42.5,12.5 49.5,12.5 53.5,8.5 53.5,3.5 56,1
GND on Bottom Layer "Bottom Layer-GND" (solid, pour order 35): 1.5,1 71.5,1 71.5,99 1.5,99
+12V_Out on Bottom Layer "Bottom Layer-+12V_Out" (solid, pour order 34): 10.5,14.5 10.5,20 22,20 22,14.5 53,14.5 53,1 14,1 10.5,4.5
no net on Bottom Solder "Bottom Solder-No Net" (solid): 22,20 10.5,20 10.5,9 10.5,4.5 14,1 54,1 54.5,1.5 54.5,2 53.5,3 53,3.5 53,6 42.5,6 42,6.5 42,12.3 41.09,13.273 41.067,14.226 24.439,14.226 22,16.665
no net on Bottom Solder "Bottom Solder-No Net" (solid): 53.5,3.5 56,1 57,1 57,20.5 54.5,23 44,23 42,21 40.575,21 38.575,17 41.5,17 41.5,13.5 42,13 42,20 55.897,20 55.897,6 53.5,6
no net on Top Solder "Top Solder-No Net" (solid): 22,20 10.5,20 10.5,9 10.5,4.5 14,1 54,1 54.5,1.5 54.5,2 53.5,3 53,3.5 53,6.182 42.317,6.182 42,6.5 42,12.3 41.09,13.273 41.067,14.226 24.439,14.226 22,16.665
no net on Top Solder "Top Solder-No Net" (solid): 53.5,3.5 56,1 57,1 57,20.5 54.5,23 44,23 42,21 40.575,21 38.575,17 41.5,17 41.5,13.5 42,13 42,19.939 55.897,19.939 55.897,6 53.5,6

## Keep-outs
Keep-Out Layer:
  the board outline again, w0.254

## Silkscreen, mask and mechanical layers (free items; w line width, h text height)
Top Overlay:
  lines w0.6: 81,0.5 81,99
  text "ACCHV+" at 156.5,54.873 h1
  text "ACCHV+" at 156.5,50 h1
  text "MCHV+" at 157,39.5 h1
  text "MCHV+" at 157,29.5 h1
  text "LV" at 68.333,28.5 h5
  text "HV" at 83.5,28.5 h5
  text "HV-" at 160,22 h1
  text "HV-" at 160,15.218 h1
Bottom Overlay:
  text "Design and Layout by: Brian Santa Maria" at 67.267,86.5 h1.5
  text "a" at 61.5,61.6 h35

## Text inside footprints (layer, text, board x,y; h text height)
C2: Top Overlay "+" at 30.877,19.75 h2 r90
D3: Top Overlay "*" at 117.228,24.892 h1.52
U6: Top Overlay "-in" at 111.904,20.759 h1.52 r180; Top Overlay "cl" at 110.126,17.203 h1.52 r180; Top Overlay "ad" at 110.634,11.488 h1.52 r180; Top Overlay "+in" at 111.904,4.25 h1.52 r180; Top Overlay "da" at 110.634,14.282 h1.52 r180; Top Overlay "-out" at 55.897,9.837 h1.52 r180; Top Overlay "-out" at 55.897,20.886 h1.52 r180; Top Overlay "+out" at 55.897,15.425 h1.52 r180; Top Overlay "+out" at 55.897,4.376 h1.52 r180